# Altium PCB DriveController.PcbDoc
Units mil, origin at the board's own origin, x right, y up, seen from the top; angles counter-clockwise.
Board outline 4725 x 2500 mil, 2 copper layers (Top Layer, Bottom Layer); 25 components, 90 nets, 166 pads, 0 vias.
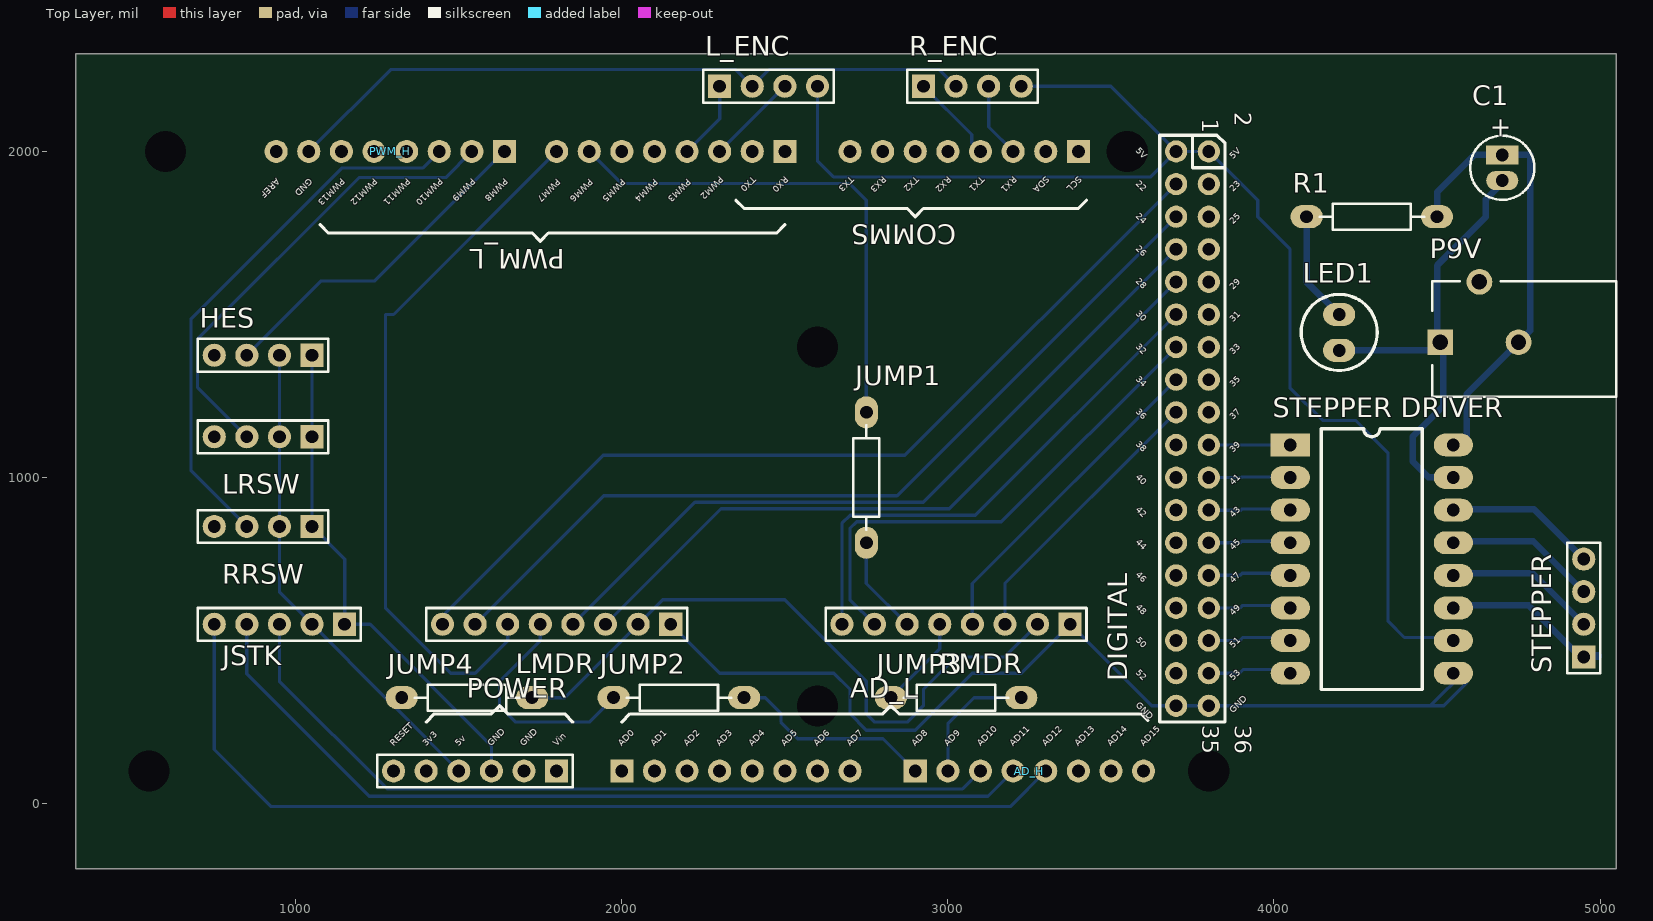
[diagram p0: Top Layer view]
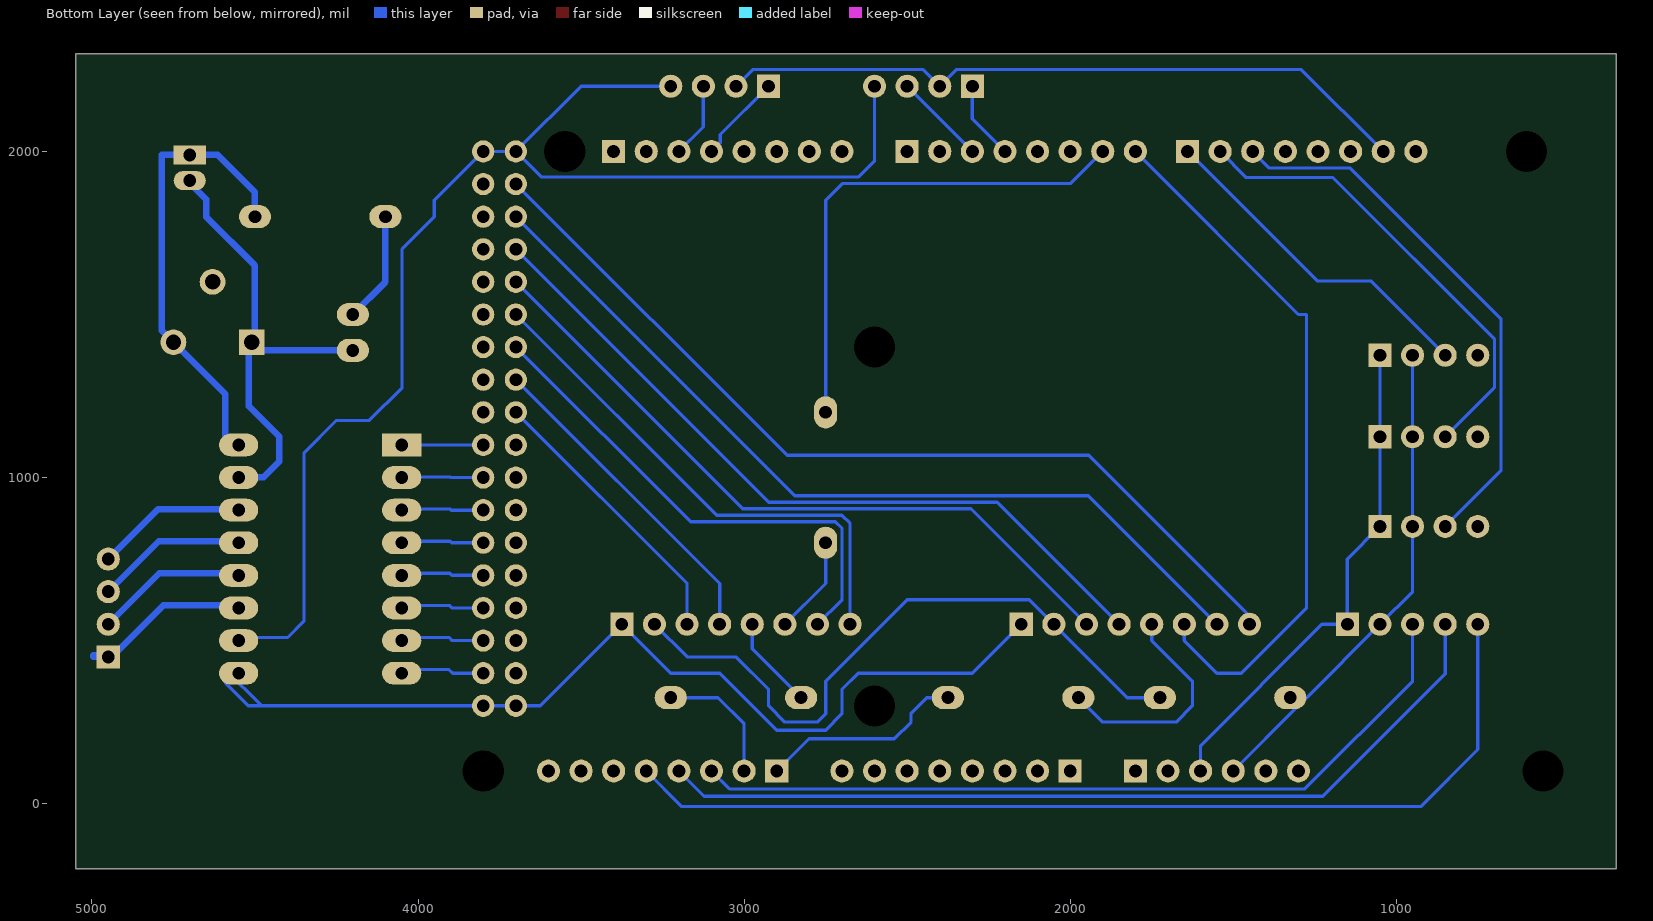
[diagram p1: Bottom Layer view, seen from below]

## Layer stack, top to bottom
Top Solder: solder mask 0.4, Solder Resist, Dk 3.5
Top Layer: signal copper 1.4
Dielectric1: dielectric 12.6, FR-4, Dk 4.8
Bottom Layer: signal copper 1.4
Bottom Solder: solder mask 0.4, Solder Resist, Dk 3.5

## Board outline
325,-200 325,2300 5050,2300 5050,-200

## Design rules (kind name [scope] priority, off if disabled: settings)
Clearance [All] p1: gap=10
PolygonConnect [All] p1: connectstyle=Relief reliefconductorwidth=10 reliefentries=4 polygonreliefangle="90 Angle" airgapwidth=10
RoutingLayers [All] p1: top layer_v5=FALSE bottom layer_v5=TRUE
RoutingLayers ViaBonanza [All] p2 off: top layer_v5=TRUE bottom layer_v5=TRUE
RoutingTopology RoutingTopology_1 [All] p1: topology=Shortest
RoutingVias [All] p1: holewidth=28 width=50 viastyle="Through Hole" minholewidth=28 minwidth=50 maxholewidth=28 maxwidth=50
SilkToSolderMaskClearance SilkscreenOverComponentPads [IsPad] p1: minsilkscreentomaskgap=10 clearancetoexposedcopper=TRUE
SolderMaskExpansion [All] p1: expansion=4
UnpouredPolygon [All] p1: allowunpoured=FALSE
Width [All] p1: maxlimit=20 minlimit=10 preferedwidth=20 minimp=50.000000 maximp=50.000000 favimp=50.000000
Width Power [(InNet('V+') OR InNet('V-') OR InNet('GND') OR InNet ('ST1') OR InNet ('ST2') OR InNet ('ST3') OR InNet ('ST4'))] p2: maxlimit=30 minlimit=20 preferedwidth=25
26 further rules are at their usual default settings.

## Components (designator, comment, footprint, x,y, rotation, side; value= is the part's Value field where it differs from the comment)
AD_H "AD_H" "HEADER 8X1 8.5MM" 2900,100 r0 top locked
AD_L "AD_L" "HEADER 8X1 8.5MM" 2000,100 r0 top locked
C1 "" CAPPOL2MM_LGE1.0 4700,1950 r270 top
COMMS "Communication" "HEADER 8X1 8.5MM" 3400,2000 r180 top
DIGITAL "IO_36" "HEADER 36X 8MM" 3800,2000 r270 top
HES "Hall Effect" HDR1X4_LGE1.0 1050,1375 r180 top
JSTK "Joystick" HDR1X5_LGE1.0 1150,550 r180 top
JUMP1 "C-Hdr1x2" Res10mm_LGE1.0 2750,1000 r90 top
JUMP2 "C-Hdr1x2" Res10mm_LGE1.0 2175,325 r0 top
JUMP3 "C-Hdr1x2" Res10mm_LGE1.0 3025,325 r0 top
JUMP4 "C-Hdr1x2" Res10mm_LGE1.0 1525,325 r180 top
L_ENC "Left Encoder" HDR1X4_LGE1.0 2300,2200 r0 top
LED1 "C503B-RAN-CY0B0AA1" LED_LGE1.0 4200,1450 r270 top
LMDR "Left Motor Driver" HDR1X8_LGE1.0 2150,550 r180 top
LRSW "Left Rotation Sw" HDR1X4_LGE1.0 1050,1125 r180 top
P9V "9V in" KLD_XLGE1.2 5050,1425 r180 top
POWER "POWER" "HEADER 6X1 8.5MM" 1800,100 r180 top locked
PWM_H "PWM_H" "HEADER 8X1 8.5MM" 1640,2000 r180 top locked
PWM_L "PWM_L" "HEADER 8X1 8.5MM" 2500,2000 r180 top locked
R1 "G-Res" RES10MM_LGE1.0 4300,1800 r0 top
R_ENC "Right Encoder" HDR1X4_LGE1.0 2925,2200 r0 top
RMDR "Right Motor Driver" HDR1X8_LGE1.0 3375,550 r180 top
RRSW "Right Rotation Sw" HDR1X4_LGE1.0 1050,850 r180 top
STEPPER "Stepper Output" HDR1X4_LGE1.0 4950,450 r90 top
"STEPPER DRIVER" "A4988" DIP16WIDE5 4050,1100 r0 top

## Footprints (in the part's own frame and the unit in brackets; to place one, negate y for a bottom-side part, rotate by r counter-clockwise, add the part's x,y. Pads: shape width x height; smd on the part's side, far side on the other; paste and mask are expansions set on the pad)
CAPPOL2MM_LGE1.0 [mm] "Capacitor, Electrolytic, Radial; Body 5 x 6.8 mm (Dia.xH typ); Pin Spacing 2 mm (typ)"
  rect 1.5x2.5 hole 1: 1(-1,0)
  oval 1.5x2.5 hole 1: 2(1,0)
  silkscreen extent -2.5,-2.5 2.5,2.5
DIP16WIDE5 [mil] "For Stepper Driver mount"
  rect 120x70 hole 39.37: 1(0,0)
  oval 120x70 hole 39.37: 2(0,-100) 3(0,-200) 4(0,-300) 5(0,-400) 6(0,-500) 7(0,-600) 8(0,-700) 9(500,-700) 10(500,-600) 11(500,-500) 12(500,-400) 13(500,-300) 14(500,-200) 15(500,-100) 16(500,0)
  silkscreen extent 95,-750 405,50
HDR1X4_LGE1.0 [mm] "Connector; Header; 4 Position"
  rect 1.8x1.8 hole 1: 1(0,0)
  round 1.8 hole 1: 2(2.54,0) 3(5.08,0) 4(7.62,0)
  silkscreen extent -1.27,-1.27 8.89,1.27
HDR1X5_LGE1.0 [mm] "Connector; Header; 6 Position"
  rect 1.8x1.8 hole 1: 1(0,0)
  round 1.8 hole 1: 2(2.54,0) 3(5.08,0) 4(7.62,0) 5(10.16,0)
  silkscreen extent -1.27,-1.27 11.43,1.27
HDR1X8_LGE1.0 [mm] "Connector; Header; 8 Position"
  rect 1.8x1.8 hole 1: 1(0,0)
  round 1.8 hole 1: 2(2.54,0) 3(5.08,0) 4(7.62,0) 5(10.16,0) 6(12.7,0) 7(15.24,0) 8(17.78,0)
  silkscreen extent -1.27,-1.27 19.05,1.27
"HEADER 6X1 8.5MM" [mm] "Stackable 6 pin header"
  rect 1.8x1.8 hole 1: 1(0,0)
  round 1.8 hole 1: 2(2.54,0) 3(5.08,0) 4(7.62,0) 5(10.16,0) 6(12.7,0)
  silkscreen extent -1.27,-1.27 13.97,1.27
"HEADER 8X1 8.5MM" [mm] "Stackable 8 pin header"
  rect 1.8x1.8 hole 1: 1(0,0)
  round 1.8 hole 1: 2(2.54,0) 3(5.08,0) 4(7.62,0) 5(10.16,0) 6(12.7,0) 7(15.24,0) 8(17.78,0)
"HEADER 36X 8MM" [mil] "Stackable 10 pin header"
  round 68 hole 39.37: 1(0,-100) 2(0,0) 3(100,-100) 4(100,0) 5(200,-100) 6(200,0) 7(300,-100) 8(300,0) 9(400,-100) 10(400,0) 11(500,-100) 12(500,0) 13(600,-100) 14(600,0) 15(700,-100) 16(700,0) 17(800,-100) 18(800,0) 19(900,-100) 20(900,0) 21(1000,-100) 22(1000,0) 23(1100,-100) 24(1100,0) 25(1200,-100) 26(1200,0) 27(1300,-100) 28(1300,0) 29(1400,-100) 30(1400,0) 31(1500,-100) 32(1500,0) 33(1600,-100) 34(1600,0) 35(1700,-100) 36(1700,0)
  silkscreen extent -50,-150 1750,50, body extent -50,-150 1750,50, height 335
KLD_XLGE1.2 [mm] "DC Power Jack, PCB Mount"
  rect 2x2 hole 1.2: 1(13.716,0.254)
  round 2 hole 1.2: 2(7.62,0.254) 3(10.668,-4.445)
  silkscreen extent 0,-4.5 14.35,4.5
LED_LGE1.0 [mm] "2.8 mm (typ)"
  oval 1.8x2.5 hole 1: 1(-1.27,0) 2(1.524,0)
  silkscreen extent -2.83,-2.96 3.09,2.96
Res10mm_LGE1.0 [mm] "Axial Device, Thru-Hole; 2 Leads; 0.4 in Pin Spacing"
  oval 2.5x1.8 hole 1: 1(-5.08,0) 2(5.08,0)
  silkscreen extent -4.06,-1.02 4.06,1.02
RES10MM_LGE1.0 [mm] "Axial Device, Thru-Hole; 2 Leads; 0.4 in Pin Spacing"
  oval 2.5x1.8 hole 1: 1(-5.08,0) 2(5.08,0)
  silkscreen extent -4.06,-1.02 4.06,1.02

## Part data
C1: library part G-CapPol, "Polarized Capacitor (specify value)"
HES LRSW RRSW: library part MHDR1X4, "Header, 4-Pin"
JSTK: library part MHDR1X5, "Header, 5-Pin"
JUMP1 JUMP2 JUMP3 JUMP4: "Header, 2-Pin"
L_ENC R_ENC STEPPER: library part "Header 4", "Header, 4-Pin"
LED1: library part T-LEDRedHI, "LED (high intensity - red)"
LMDR RMDR: library part "Header 8", "Header, 8-Pin"
P9V: library part C-Pwr, "Low Voltage Power Supply Connector"
R1: "resistor (specify value)"

## Free pads (board coordinates)
  round 62.99 hole 125.98: 0(550,100) 0(600,2000) 0(2600,300) 0(2600,1400) 0(3550,2000) 0(3800,100)

## Nets (pads, with @x,y where several pads share a name; then routed paths per layer and width w, separated by ;. In a path a pad name is that pad's centre, name@x,y a point inside that pad or via, vN(x,y) a via of type N, cw(c..) or ccw(c..) an arc to the next point about the centre after c; other vN are vias at no path point)
3V3: POWER.5
5V: HES.2 JSTK.2 JUMP4.2 LRSW.2 POWER.4 RRSW.2 | length 1552.8
  Bottom Layer w10: HES.2 LRSW.2 RRSW.2 950,650 JSTK.2 1275,325 ; JUMP4.2 1275,325 ; POWER.4 1300,300 1275,325
5VB: "STEPPER DRIVER.10" DIGITAL.1 DIGITAL.2 L_ENC.4 R_ENC.4 | length 4028.2
  Bottom Layer w10: L_ENC.4 2600,1971 2649,1922 3622,1922 DIGITAL.1 ; R_ENC.4 3500,2200 DIGITAL.1 ; 4590.55,509.45 4400,509.45 4350,559.45 4350,1075 4250,1175 4149,1175 4049,1275 4049,1701 3950,1800 3950,1850 DIGITAL.2 DIGITAL.1
5VMDR: JUMP4.1 LMDR.2 RMDR.2 | length 2041.7
  Bottom Layer w10: JUMP4.1 1825,325 LMDR.2 2125,625 2500,625 2750,375 2750,275 2775,250 2875,250 2925,300 2925,350 3025,450 3175,450 RMDR.2
AD0: AD_L.1
AD1: AD_L.2
AD2: AD_L.3
AD3: AD_L.4
AD4: AD_L.5
AD5: AD_L.6
AD6: AD_L.7
AD7: AD_L.8
AD8: AD_H.1 JUMP2.2 | length 634
  Bottom Layer w10: JUMP2.2 2440,325 2488,277 2488,250 2539,199 2801,199 AD_H.1
AD9: AD_H.2 JUMP3.2 | length 403.1
  Bottom Layer w10: AD_H.2 3000,245 3080,325 JUMP3.2
AD10: AD_H.3 JSTK.3 | length 2484.5
  Bottom Layer w10: JSTK.3 950,375 1280,45 3045,45 AD_H.3
AD11: AD_H.4 JSTK.4 | length 2689.2
  Bottom Layer w10: JSTK.4 850,398 1225,23 3123,23 AD_H.4
AD12: AD_H.5 JSTK.5 | length 3051.6
  Bottom Layer w10: JSTK.5 750,166 925,-9 3191,-9 AD_H.5
AD13: AD_H.6
AD14: AD_H.7
AD15: AD_H.8
AREF: PWM_H.8
GND1: HES.1 JSTK.1 LRSW.1 POWER.2 POWER.3 RRSW.1 | length 1548.5
  Bottom Layer w10: HES.1 LRSW.1 RRSW.1 1150,750 JSTK.1 1228,550 1600,178 POWER.3
GND2: "STEPPER DRIVER.9" DIGITAL.35 DIGITAL.36 LMDR.1 RMDR.1 | length 3084.3
  Bottom Layer w10: LMDR.1 2300,400 2650,400 2700,350 2700,275 2750,225 2900,225 3075,400 3225,400 RMDR.1 3625,300 DIGITAL.35 DIGITAL.36 4479.53,300 ; 4479.53,300 4520.55,300 4590.55,370 4590.55,411.02 4479.53,300
GND3: L_ENC.2 PWM_H.7 R_ENC.2 | length 2152.3
  Bottom Layer w10: PWM_H.7 1291,2251 2349,2251 L_ENC.2 2451,2251 2974,2251 R_ENC.2
IO22: DIGITAL.3 LMDR.8 | length 2823.8
  Bottom Layer w10: LMDR.8 1450,575 1943,1068 2868,1068 DIGITAL.3
IO23: DIGITAL.4
IO24: DIGITAL.5 LMDR.7 | length 2667.8
  Bottom Layer w10: LMDR.7 1944.21,944.21 2844.21,944.21 DIGITAL.5
IO25: DIGITAL.6
IO26: DIGITAL.7 LMDR.4 | length 2326.3
  Bottom Layer w10: LMDR.4 2224.21,924.21 2924.21,924.21 DIGITAL.7
IO27: DIGITAL.8
IO28: DIGITAL.9 LMDR.3 | length 2184.9
  Bottom Layer w10: LMDR.3 2304.21,904.21 3004.21,904.21 DIGITAL.9
IO29: DIGITAL.10
IO30: DIGITAL.11 RMDR.8 | length 1599.6
  Bottom Layer w10: RMDR.8 2675,859.21 2700,884.21 3084.21,884.21 DIGITAL.11
IO31: DIGITAL.12
IO32: DIGITAL.13 RMDR.7 | length 1555.9
  Bottom Layer w10: RMDR.7 2699.57,625.43 2699.57,843.78 2720,864.21 3164.21,864.21 DIGITAL.13
IO33: DIGITAL.14
IO34: DIGITAL.15 RMDR.4 | length 1008.9
  Bottom Layer w10: RMDR.4 3075,675 DIGITAL.15
IO35: DIGITAL.16
IO36: DIGITAL.17 RMDR.3 | length 867.5
  Bottom Layer w10: RMDR.3 3175,675 DIGITAL.17
IO37: DIGITAL.18
IO38: DIGITAL.19
IO39: "STEPPER DRIVER.1" DIGITAL.20 | length 200
  Bottom Layer w10: DIGITAL.20 4000,1100
IO40: DIGITAL.21
IO41: "STEPPER DRIVER.2" DIGITAL.22 | length 200.7
  Bottom Layer w10: DIGITAL.22 3899,1000 3900.57,1001.57 4000,1001.57
IO42: DIGITAL.23
IO43: "STEPPER DRIVER.3" DIGITAL.24 | length 201.3
  Bottom Layer w10: DIGITAL.24 3898,900 3901.15,903.15 4000,903.15
IO44: DIGITAL.25
IO45: "STEPPER DRIVER.4" DIGITAL.26 | length 202
  Bottom Layer w10: DIGITAL.26 3897,800 3901.72,804.72 4000,804.72
IO46: DIGITAL.27
IO47: "STEPPER DRIVER.5" DIGITAL.28 | length 202.6
  Bottom Layer w10: DIGITAL.28 3896,700 3902.3,706.3 4000,706.3
IO48: DIGITAL.29
IO49: "STEPPER DRIVER.6" DIGITAL.30 | length 203.3
  Bottom Layer w10: DIGITAL.30 3896,600 3903.87,607.87 4000,607.87
IO50: DIGITAL.31
IO51: "STEPPER DRIVER.7" DIGITAL.32 | length 203.9
  Bottom Layer w10: DIGITAL.32 3895,500 3904.45,509.45 4000,509.45
IO52: DIGITAL.33
IO53: "STEPPER DRIVER.8" DIGITAL.34 | length 204.6
  Bottom Layer w10: DIGITAL.34 3894,400 3905.02,411.02 4000,411.02
LAD: JUMP2.1 LMDR.5 | length 703.6
  Bottom Layer w10: LMDR.5 1750,500 1625,375 1625,300 1675,250 1900,250 JUMP2.1
LPWM: LMDR.6 PWM_L.8 | length 2181.4
  Bottom Layer w10: LMDR.6 1650,500 1550,400 1475,400 1275,600 1275,1500 1300,1500 PWM_L.8
NetLED1_1: LED1.1 R1.1 | length 341.4
  Bottom Layer w20: R1.1 4100,1600 LED1.1
PWM2: L_ENC.3 PWM_L.3 | length 282.8
  Bottom Layer w10: PWM_L.3 L_ENC.3
PWM3: L_ENC.1 PWM_L.4 | length 241.4
  Bottom Layer w10: PWM_L.4 2300,2100 L_ENC.1
PWM4: PWM_L.5
PWM5: PWM_L.6
PWM6: JUMP1.2 PWM_L.7 | length 1562.1
  Bottom Layer w10: PWM_L.7 1998,1902 2698,1902 2750,1850 JUMP1.2
PWM8: HES.3 PWM_H.1 | length 1048.9
  Bottom Layer w10: HES.3 1078,1603 1243,1603 PWM_H.1
PWM9: LRSW.3 PWM_H.2 | length 1441.7
  Bottom Layer w10: LRSW.3 699,1276 699,1425 1194,1920 1460,1920 PWM_H.2
PWM10: PWM_H.3 RRSW.3 | length 1681.3
  Bottom Layer w10: RRSW.3 679,1021 679,1487 1141,1949 1389,1949 PWM_H.3
PWM11: PWM_H.4
PWM12: PWM_H.5
PWM13: PWM_H.6
RAD: JUMP3.1 RMDR.5 | length 287.1
  Bottom Layer w10: JUMP3.1 2975,475 RMDR.5
RESET: POWER.6
RPWM: JUMP1.1 RMDR.6 | length 301.8
  Bottom Layer w10: JUMP1.1 2750,675 RMDR.6
RX0: PWM_L.1
RX1: COMMS.3 R_ENC.3 | length 231.1
  Bottom Layer w10: R_ENC.3 3125,2075 COMMS.3
RX2: COMMS.5
RX3: COMMS.7
SCL: COMMS.1
SDA: COMMS.2
ST1: "STEPPER DRIVER.14" STEPPER.4 | length 422.9
  Bottom Layer w20: 4590.55,903.15 4796.85,903.15 STEPPER.4
ST2: "STEPPER DRIVER.13" STEPPER.3 | length 423.5
  Bottom Layer w20: 4590.55,804.72 4795.28,804.72 STEPPER.3
ST3: "STEPPER DRIVER.12" STEPPER.2 | length 424.2
  Bottom Layer w20: 4590.55,706.3 4793.7,706.3 STEPPER.2
ST4: "STEPPER DRIVER.11" STEPPER.1 | length 518.4
  Bottom Layer w20: 4590.55,607.87 4781.26,607.87 4934.57,454.57 4995.43,454.57 4995.43,450 STEPPER.1
TX0: PWM_L.2
TX1: COMMS.4 R_ENC.1 | length 272.5
  Bottom Layer w10: R_ENC.1 3073,2052 3073,2027 COMMS.4
TX2: COMMS.6
TX3: COMMS.8
V+: "STEPPER DRIVER.16" C1.1 P9V.2 R1.2 | length 1378.2
  Bottom Layer w20: R1.2 4500,1875 4614.37,1989.37 C1.1 4785.63,1989.37 4785.63,1450.63 P9V.2 4590.55,1255.55 4590.55,1100
V-: "STEPPER DRIVER.15" C1.2 LED1.2 P9V.1 | length 1544.7
  Bottom Layer w10: C1.2@4659,1910.63 C1.2
  Bottom Layer w20: LED1.2 4485,1390 P9V.1 ; 4590.55,1001.57 4473.43,1001.57 4425,1050 4425,1125 4519.17,1219.17 4519.17,1405.83 P9V.1 ; C1.2 4700,1891.1 4687.57,1891.1 4650,1853.53 4650,1800 4500,1650 4500,1425 P9V.1
VIN: POWER.1
pads on no net: HES.4 LRSW.4 P9V.3 RRSW.4

## Silkscreen, mask and mechanical layers (free items; w line width, h text height)
Top Overlay:
  lines w10: 1075,1775 1100,1750 1725,1750 1750,1725 1775,1750 2475,1750 2500,1775 ; 1400,250 1425,275 1600,275 1625,300 1650,275 1825,275 1850,250 ; 2000,250 2025,275 2800,275 2825,300 2850,275 3592.93,275 3612.7,255.23 ; 2350,1850 2375,1825 2875,1825 2900,1800 2925,1825 3400,1825 3425,1850
  text "5V" at 3575,2000 h20 r315
  text "5V" at 3875,1975 h20 r45
  text "PWM2" at 2300,1925 h20 r225
  text "TX0" at 2400,1925 h20 r225
  text "RX0" at 2500,1925 h20 r225
  text "TX3" at 2700,1925 h20 r225
  text "RX3" at 2800,1925 h20 r225
  text "TX2" at 2900,1925 h20 r225
  text "RX2" at 3000,1925 h20 r225
  text "TX1" at 3100,1925 h20 r225
  text "RX1" at 3200,1925 h20 r225
  text "SDA" at 3300,1925 h20 r225
  text "SCL" at 3400,1925 h20 r225
  text "AREF" at 940,1920 h20 r225
  text "GND" at 1040,1920 h20 r225
  text "PWM13" at 1140,1920 h20 r225
  text "PWM12" at 1240,1920 h20 r225
  text "PWM11" at 1340,1920 h20 r225
  text "PWM10" at 1440,1920 h20 r225
  text "PWM9" at 1540,1920 h20 r225
  text "PWM8" at 1640,1920 h20 r225
  text "PWM7" at 1800,1917.93 h20 r225
  text "PWM6" at 1900,1917.93 h20 r225
  text "PWM5" at 2000,1917.93 h20 r225
  text "PWM4" at 2100,1917.93 h20 r225
  text "PWM3" at 2200,1917.93 h20 r225
  text "22" at 3575,1900 h20 r315
  text "23" at 3875,1875 h20 r45
  text "24" at 3575,1800 h20 r315
  text "25" at 3875,1775 h20 r45
  text "26" at 3575,1700 h20 r315
  text "28" at 3575,1600 h20 r315
  text "29" at 3875,1575 h20 r45
  text "30" at 3575,1500 h20 r315
  text "31" at 3875,1475 h20 r45
  text "32" at 3575,1400 h20 r315
  text "33" at 3875,1375 h20 r45
  text "34" at 3575,1300 h20 r315
  text "35" at 3875,1275 h20 r45
  text "36" at 3575,1200 h20 r315
  text "37" at 3875,1175 h20 r45
  text "38" at 3575,1100 h20 r315
  text "39" at 3875,1075 h20 r45
  text "40" at 3575,1000 h20 r315
  text "41" at 3875,975 h20 r45
  text "42" at 3575,900 h20 r315
  text "43" at 3875,875 h20 r45
  text "44" at 3575,800 h20 r315
  text "45" at 3875,775 h20 r45
  text "46" at 3575,700 h20 r315
  text "47" at 3875,675 h20 r45
  text "48" at 3575,600 h20 r315
  text "49" at 3875,575 h20 r45
  text "50" at 3575,500 h20 r315
  text "51" at 3875,475 h20 r45
  text "52" at 3575,400 h20 r315
  text "53" at 3875,375 h20 r45
  text "GND" at 3575,300 h20 r315
  text "GND" at 3875,275 h20 r45
  text "RESET" at 1300,175 h20 r45
  text "3v3" at 1400,175 h20 r45
  text "5v" at 1500,175 h20 r45
  text "GND" at 1600,175 h20 r45
  text "GND" at 1700,175 h20 r45
  text "Vin" at 1800,175 h20 r45
  text "AD0" at 2000,175 h20 r45
  text "AD1" at 2100,175 h20 r45
  text "AD2" at 2200,175 h20 r45
  text "AD3" at 2300,175 h20 r45
  text "AD4" at 2400,175 h20 r45
  text "AD5" at 2500,175 h20 r45
  text "AD6" at 2600,175 h20 r45
  text "AD7" at 2700,175 h20 r45
  text "AD8" at 2900,175 h20 r45
  text "AD9" at 3000,175 h20 r45
  text "AD10" at 3100,175 h20 r45
  text "AD11" at 3200,175 h20 r45
  text "AD12" at 3300,175 h20 r45
  text "AD13" at 3400,175 h20 r45
  text "AD14" at 3500,175 h20 r45
  text "AD15" at 3600,175 h20 r45
Mechanical 1:
  circle w5: c600,2000 r62.99
  circle w5: c2600,300 r62.99
  circle w5: c550,100 r62.99
  circle w5: c2600,1400 r62.99
  circle w5: c3550,2000 r62.99
  circle w5: c3800,100 r62.99
  lines w10: 4725,-175 4725,-200 ; 4725,-200 325,-200 325,2300 4725,2300 5050,2300 5050,-200 4725,-200

## Text inside footprints (layer, text, board x,y; h text height)
C1: Top Overlay "+" at 4670.47,2106.5 h59.06 r270
DIGITAL: Top Overlay "2" at 3880,2120 h50 r270; Top Overlay "1" at 3780,2100 h50 r270; Top Overlay "35" at 3780,240 h50 r270; Top Overlay "36" at 3880,240 h50 r270